# Altium PCB CDH_PCB_reva01.PcbDoc (part 2 of 2)
Units mil, origin at the board's own origin, x right, y up, seen from the top; angles counter-clockwise.
Board outline 4760 x 6365 mil, 4 copper layers (Component Side, Ground Plane, Power Plane, Solder Side), stack 60.8 mil thick; 111 components, 99 nets, 581 pads, 205 vias.
Unrouted connection lines stored in the file: 7.
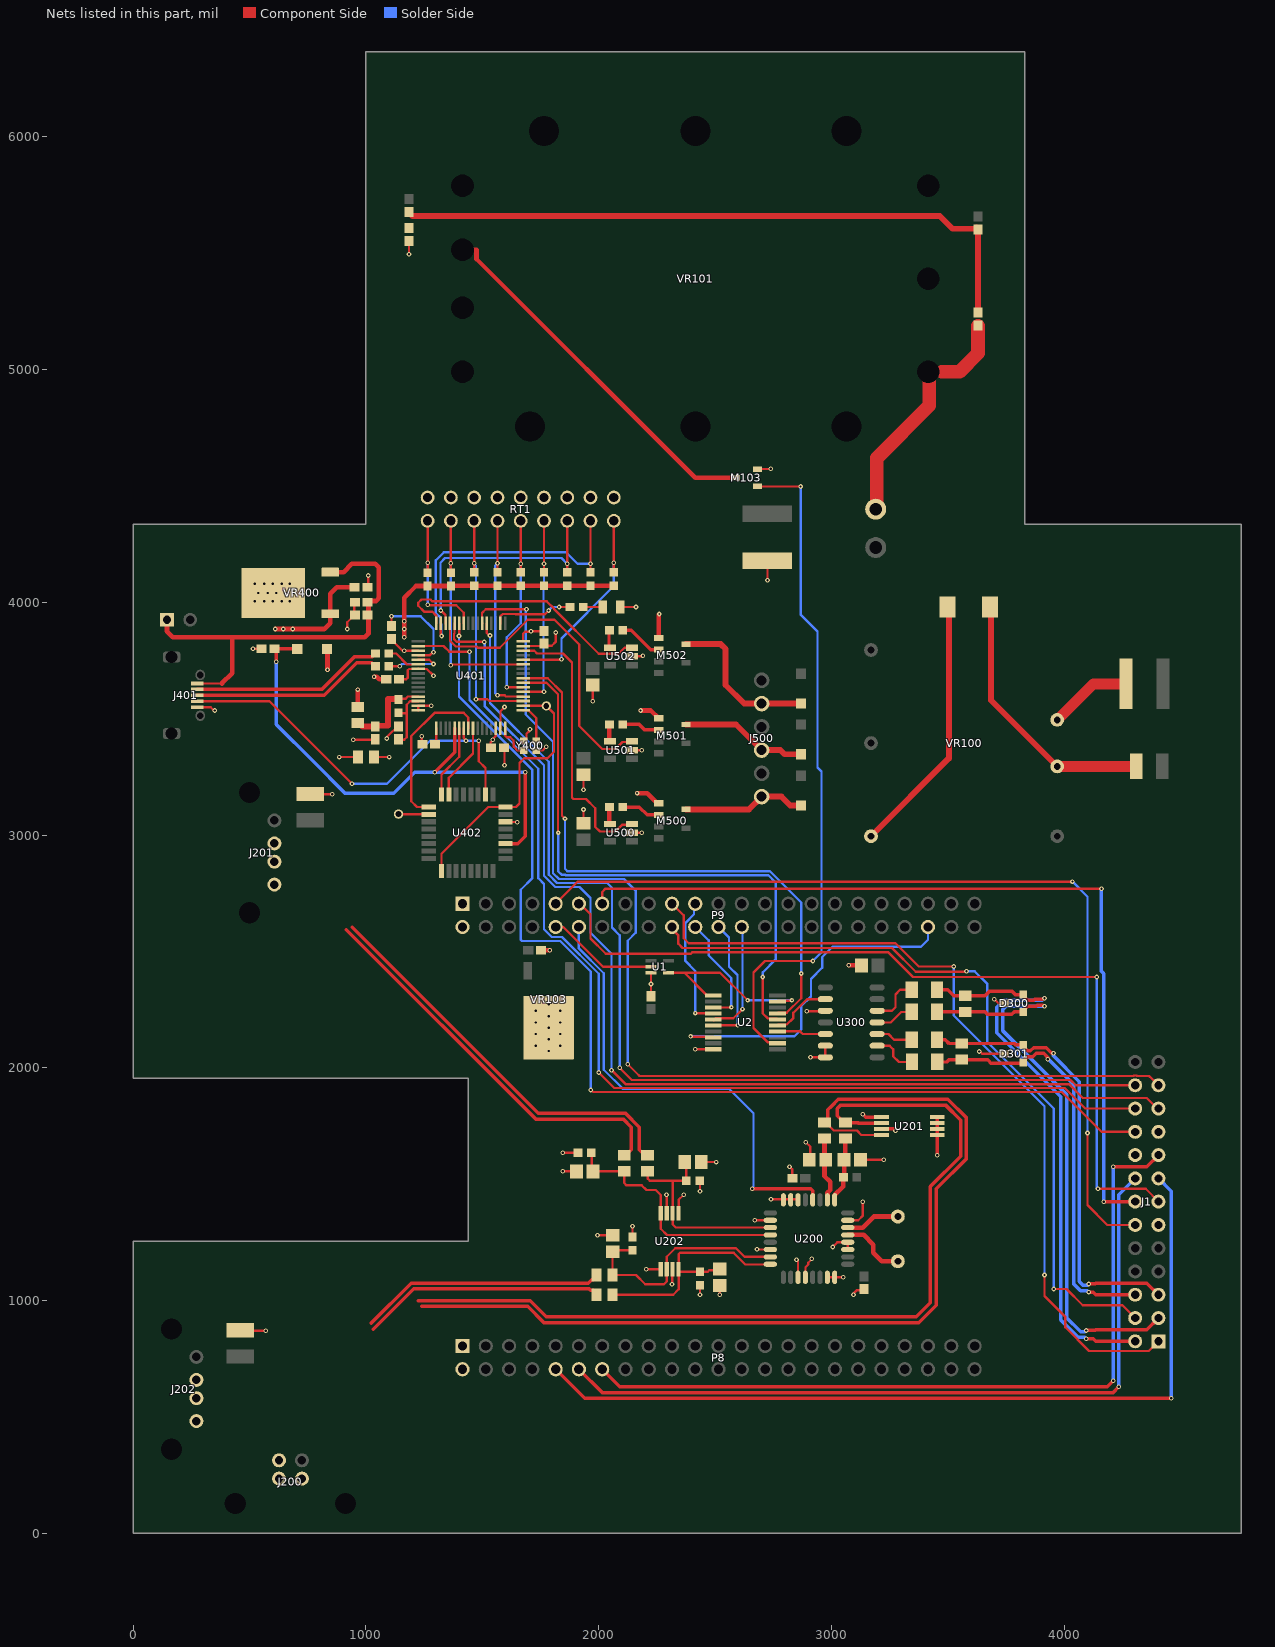
[diagram p4: the nets of this part, all layers, seen from the top]

## Via types
v1: diameter 20, hole 10, Component Side to Solder Side, 183 vias
v2: diameter 20, hole 8, Component Side to Solder Side, 22 vias

## Nets (pads, with @x,y where several pads share a name; then routed paths per layer and width w, separated by ;. In a path a pad name is that pad's centre, name@x,y a point inside that pad or via, vN(x,y) a via of type N, cw(c..) or ccw(c..) an arc to the next point about the centre after c; other vN are vias at no path point) (continued)
GND: C100.1 C101.1 C101.2 C103.1 C109.1 C110.1 C115.1 C200.1 C201.2 C202.2 C203.2 C204.2 C205.2 C206.2 C207.2 C208.1 C209.1 C300.2 C400.2 C401.2 C402.2 C403.2 C404.2 C405.2 C406.2 C410.2 C500.1 C501.1 C502.1 D300.3 D301.3 J1.11 J1.18 J1.19 J200.GND J200.Shield J201.GND J201.Shield J202.GND J202.Shield J401.5 L401.2 LED400.1 M103.2 M500.S1 M501.S1 M502.S1 P8.1 P8.2 P9.1 P9.2 R206.2 R207.2 R208.1 R209.1 U1.3 U2.10 U200.6 U200.7 U200.8 U200.10 U200.14 U200.19 U200.20 U200.23 U200.24 U200.27 U200.28 U200.31 U201.1 U201.3 U201.5 U201.6 U201.7 U201.8 U202.1 U202.3 U202.5 U202.7 U300.3 U300.6 U300.7 U401.4 U401.31 U401.47 U402.6 U500.2 U501.2 U502.2 VR100.2 VR100.5 VR101.4 VR103.4 VR400.4 Y400.2 Y400.4 | length 7440.8
  Component Side w10: J401.5@275,3549.09 333.2,3549.09 347.29,3535 v1(350,3535) ; C203.2@460,872.2 462.2,870 v1(570,870) ; v1(515,3800) C410.2@548.58,3800 ; C202.2@760,3176.1 761.1,3175 v1(855,3175) ; v1(885,3335) L401.2@965.55,3335 ; v1(920,3885) 920,3914.29 950,3944.29 949.29,3945 C406.2@949.29,4000 ; C401.2@1010,4065 v1(1010,4115) ; C404.2@1110,3900.71 v1(1110,3940) ; v1(1185,5495) C115.1@1185,5552.44 ; U401.4@1225,3773 1275.29,3773 1287.29,3785 v1(1290,3785) ; U401.31@1578,3459 1578,3531.65 1595,3548.65 v1(1595,3550) ; v1(1595,3300) 1595,3374.29 C402.2@1595.71,3375 ; U402.6@1599.57,3057.24 1600.69,3056.12 1648.88,3056.12 v1(1650,3055) ; U401.47@1675,3812 1763.71,3812 1765,3813.29 1798.29,3813.29 1815,3830 v1(1815,3870) ; Y400.4@1678.42,3404.67 1680.39,3404.67 1690.16,3414.43 1690.16,3435.16 1700,3445 1700,3447.29 1705,3452.29 v1(1705,3455) ; Y400.2@1731.57,3363.33 1758.33,3363.33 v1(1775,3380) ; v1(1845,1555) C206.2@1904.57,1555 C206.2@1909.49,1555 ; v1(1845,1635) R207.2@1911.46,1635 ; C500.1@1920,3050 1935,3065 v1(1935,3110) ; v1(1935,3194.57) C501.1@1935,3259.13 ; v1(1975,3575) C502.1@1975,3644.57 ; v1(1995,1280) 2054.49,1280 2059.49,1275 C208.1@2060,1275.51 ; LED400.1@2092.4,3980 v2(2160,3980) ; U500.2@2142.24,3010 v1(2185,3010) ; U501.2@2142.24,3365 v1(2185,3365) ; U502.2@2142.24,3767.4 2143.54,3768.7 2188.7,3768.7 v1(2190,3770) ; R208.1@2145,1273.54 v1(2145,1320) ; v1(2205,1135) 2266.54,1135 U202.1@2266.61,1134.92 ; C109.1@2225,2307.56 v1(2225,2360) 2225,2408.62 U1.3@2225.2,2408.82 ; M500.S1@2250.98,3136.69 M500.S1@2257.68,3136.69 ; v2@2257.68,3947.68 v2(2260,3950) ; v1(2291.55,1455.11) 2292.2,1454.46 U202.7@2292.2,1375.08 ; v1(2315,1070) 2316.4,1071.4 2316.4,1133.52 U202.3@2317.8,1134.92 ; U202.5@2343.39,1375.08 2343.39,1433.39 v1(2365,1455) ; v1(2415,2080) 2492.05,2080 U2.10@2492.2,2079.84 ; R206.2@2433.54,1515 2435,1513.54 v1(2435,1470) ; v1(2435,1025) R209.1@2435,1066.46 R209.1@2436.46,1065 ; C207.2@2435.51,1595 C207.2@2440.43,1595 v1(2505,1595) ; v1(2520,1025) C209.1@2520,1064.57 2520,1069.49 C209.1@2520.51,1070 ; v1(2670,1345) 2670.08,1345.08 U200.10@2737.4,1345.08 ; v1(2680,1220) 2680.45,1219.55 2736.95,1219.55 U200.14@2737.4,1219.09 ; M103.2@2682.24,4572.4 2737.4,4572.4 v1(2738.7,4573.7) ; v1(2725,4095) C100.1@2725,4179.21 ; v1(2740,1435) 2825,1435 2854.17,1435 U200.6@2856.5,1432.68 ; v1(2820,1575) 2831.46,1563.54 C201.2@2831.46,1525 ; v1(2850,1175) 2856.5,1168.5 U200.19@2856.5,1100 ; U200.20@2887.99,1100 2888.54,1100.55 2888.54,1143.54 2900,1155 2900,1162.29 2915,1177.29 v1(2915,1180) ; v1(2890,1680) 2909.49,1660.51 C204.2@2909.49,1605 ; v1(2893.32,2243.32) 2972.1,2243.32 U300.3@2973.78,2245 ; v1(2910,2045) U300.7@2973.78,2045 U300.6@2973.78,2095 ; U200.23@2982.48,1100 U200.24@3013.98,1100 v1(3050,1100) ; v1(3005,1230) 3025.59,1250.59 U200.28@3070.08,1250.59 U200.27@3070.08,1219.09 ; U200.31@3070.08,1345.08 3115.08,1345.08 3135,1365 v1(3135,1425) ; v1(3095,1025) 3095,1030 3110,1045 3137.09,1045 C200.1@3140,1047.91 ; C205.2@3120.51,1605 C205.2@3125.43,1605 v1(3225,1605) ; v1(3635,2070) 3637.71,2070 3647.71,2060 D301.3@3745.63,2060 ; v1(3700,2295) 3717.6,2277.4 D300.3@3745.63,2277.4
  Component Side w15: v1(3135,1800) 3136.35,1800 3147.97,1788.39 U201.1@3214.92,1788.39 ; U201.3@3214.92,1737.2 3267.8,1737.2 v1(3275,1730) ; v1(3455,1625) 3455,1788.31 U201.8@3455.08,1788.39
  Component Side w20: v1(1035,3680) 1046.32,3680 1057.32,3669 C405.2@1084.29,3669 ; C110.1@1755.71,2505 v1(1790,2505) ; v2(2165,3180) 2207.68,3180 M500.S1@2250.98,3136.69 ; v2(2180,3535) 2224.06,3535 M501.S1@2257.68,3501.38 ; M502.S1@2257.68,3846.69 v2@2257.68,3947.68 ; v1(3075,2440) C300.2@3129.06,2440 C300.2@3133.98,2440
  Component Side w25: VR100.5@3170,2995 3504.45,3329.45 C101.2@3504.45,3975 ; C101.1@3685.55,3975 3685.55,3579.45 VR100.2@3970,3295
  Component Side w47.24: VR100.2@3970,3295 C103.1@4308.9,3295
  Solder Side w10: v1(1110,3940) 1235,3940 1290,3885 v1(1290,3785)
  other v1: 1785,2072.17 1730,2095 1835,2095 1785,2122.17 1730,2145 1835,2145 1785,2172.17 1730,2195 1835,2195 1785,2222.17 1730,2245 1835,2245 1785,2272.17 522.83,4005 562.83,4005 600,4005 637.83,4005 672.83,4005 537.83,4040 577.83,4040 615,4040 652.83,4040 687.83,4040 522.83,4080 562.83,4080 600,4080 637.83,4080 672.83,4080
GND_48V: C111.1 J100.2 VR101.5 | length 1008.3
  Component Side w59: J100.2@3190,4400 3195,4405 3195,4620 3420,4845 3420,4930.21 VR101.5@3420,4990 ; VR101.5@3402.5,4977.5 3414.52,4989.52 VR101.5@3414.52,4989.97 ; VR101.5@3414.54,4990 VR101.5@3415,4990 ; 3475,4990 3550,4990 3630,5070 C111.1@3630,5186.96
GND_BASEPLATE: C111.2 C112.2 C114.1 C115.2 | length 2846.2
  Component Side w25: C112.2@1185,5677.44 1185,5674.49 1199.49,5660 3465,5660 3520,5605 3623.8,5605 3623.8,5611.59 3630,5605.39 C114.1@3630,5602.44 C111.2@3630,5245.12
NetC204_1: C204.1 R201.2 U200.2 | length 278.6
  Component Side w20: R201.2@2970,1695.55 2970.26,1695.3 2970.26,1604.74 2970,1604.49 2970,1535 2995,1510 2995,1475 2982.8,1462.8 2982.8,1432.99 U200.2@2982.48,1432.68
NetC205_1: C205.1 R200.2 R210.1 U200.1 | length 281.9
  Component Side w20: U200.1@3013.98,1432.68 3014.29,1432.99 3014.29,1454.29 3050,1490 3050,1522.28 3051.46,1523.74 R210.1@3051.46,1530 3055.47,1534.02 3055.47,1600.98 3059.74,1605.26 3059.74,1695.3 R200.2@3060,1695.55
NetC206_1: C206.1 R203.1 R207.1 U200.12 U202.8 | length 1075.8
  Component Side w10: R207.1@1968.54,1635 1970.51,1633.03 1970.51,1555 1971.06,1555.55 R203.1@2110,1555.55 2110,1505 2120,1495 2185,1495 2205,1475 2245,1475 2266.61,1453.39 U202.8@2266.61,1375.08 2266.61,1308.39 2292.91,1282.09 U200.12@2737.4,1282.09
NetC207_1: C207.1 R202.1 R206.1 U200.11 U202.6 | length 895.9
  Component Side w10: R202.1@2210,1555.55 2210.24,1555.31 2210.24,1524.76 2220,1515 2320,1515 ; C207.1@2374.49,1595 2376.46,1593.03 R206.1@2376.46,1515 2320,1515 ; U200.11@2737.4,1313.58 2331.42,1313.58 2317.8,1327.2 U202.6@2317.8,1375.08 2317.8,1512.8 2320,1515
NetC208_2: C208.2 R204.1 R208.2 U200.15 U202.2 | length 1026.8
  Component Side w10: R208.2@2145,1216.46 2061.97,1216.46 2059.45,1213.94 R204.1@2059.45,1110 2160,1110 2200,1070 2280,1070 2292.2,1082.2 U202.2@2292.2,1134.92 2292.2,1188.17 2329.03,1225 2590,1225 2627.4,1187.6 U200.15@2737.4,1187.6
NetC209_2: C209.2 R205.1 R209.2 U200.16 U202.4 | length 1052.9
  Component Side w10: R205.1@2059.45,1025 2320,1025 2343.39,1048.39 U202.4@2343.39,1127.4 ; C209.2@2513.03,1123.54 2520,1130.51 2475.51,1130.51 2468.54,1123.54 R209.2@2435,1123.54 2347.24,1123.54 U202.4@2343.39,1127.4 ; U200.16@2737.4,1156.1 2736.3,1155 2630,1155 2580,1205 2349.24,1205 2343.39,1199.14 U202.4@2343.39,1134.92 U202.4@2343.39,1127.4
NetC400_1: C400.1 C406.1 J401.1 P400.1 VR400.3 | length 1805
  Component Side w10: J401.1@275,3651.46 381.46,3651.46
  Component Side w20: P400.1@145,3925 145,3875 170,3850 425,3850 ; 381.46,3651.46 425,3695 425,3850 ; VR400.3@846.26,4129.76 904.76,4129.76 940,4165 1040,4165 1055,4150 1055,4017 1043.28,4005.28 1015.99,4005.28 C406.1@1010.71,4000 ; C406.1@1010.71,4001.18 C406.1@1010.71,4000 ; 425,3850 995,3850 1010.71,3865.71 C406.1@1010.71,4000
NetC407_1: C407.1 L400.1 R400.2 U401.13 | length 385.9
  Component Side w10: R400.2@1140,3584.71 1140.29,3585 1170,3585 1180,3595 U401.13@1225,3595
  Component Side w25: L400.1@965,3480.55 970.91,3480.55 984.9,3466.56 C407.1@1040,3466.56 ; C407.1@1039.71,3470 1040,3469.71 1095,3469.71 1095,3585 1095.29,3584.71 R400.2@1140,3584.71
NetC407_2: C407.2 C408.2 C409.1 L401.1 RT1.2 RT1.4 RT1.6 RT1.8 RT1.10 RT1.12 RT1.14 RT1.16 RT1.18 U401.15 U401.16 | length 350.1
  Component Side w10: v1(945,3410) 1038.29,3410 C407.2@1040,3408.29 ; L401.1@1034.45,3330 1039.45,3335 v1(1100,3335) ; v1(1090,3415) 1091.91,3416.91 1091.91,3422.8 1138.82,3469.71 C408.2@1140,3469.71 ; U401.16@1225,3536 U401.15@1225,3556 1225.5,3555.5 1279.5,3555.5 v1(1280,3555) ; C409.1@1239.29,3390 1240,3390.71 v1(1240,3425)
NetC408_1: C408.1 R400.1 U401.14 | length 272.9
  Component Side w10: C408.1@1140,3408.29 1141.71,3410 1165,3410 1175,3420 1175,3525 ; R400.1@1140,3523.29 1173.29,3523.29 1175,3525 ; 1175,3525 1175,3560 1190.5,3575.5 U401.14@1224.5,3575.5 ; U401.14@1224.5,3575.5 U401.14@1225,3576 U401.14@1224.5,3575.5
NetC409_2: C409.2 U401.17 | length 71.4
  Component Side w10: C409.2@1300.71,3391.18 1300.71,3390 1302,3391.29 U401.17@1302,3459 U401.17@1301.5,3458.5
NetC410_1: C410.1 D400.C U401.21 U402.3 | length 2250
  Component Side w15: v1(615,3745) 614.04,3745.96 614.04,3795.96 610,3800 D400.C@705,3800 ; v1(1295,3270) 1381,3356 U401.21@1381,3459 ; U402.3@1599.57,2962.76 1652.76,2962.76 1685,2995 v1(1685,3270)
  Solder Side w15: v1(615,3745) 615,3475 775,3315 910,3180 1120,3180 1210,3270 v1(1295,3270) v1(1685,3270)
NetD500_2: D500.A J500.1 M500.D1 | length 533.3
  Component Side w25: M500.D1@2375,3110.32 2645.31,3110.32 J500.1@2700,3165 2785,3165 2822.76,3127.24 D500.A@2870,3127.24
NetD502_2: D502.A J500.3 M501.D1 | length 548
  Component Side w25: M501.D1@2375,3475 2590,3475 J500.3@2700,3365 2780,3365 2797.99,3347.01 D502.A@2870,3347.01
NetD504_2: D504.A J500.5 M502.D1 | length 691.6
  Component Side w25: M502.D1@2375,3820.32 2524.69,3820.32 2545,3800 2545,3645 2625,3565 J500.5@2700,3565 D504.A@2870,3565
NetJ1_1: J1.1 P9.19 | length 3588
  Component Side w10: P9.19@2315,2705 2365,2655 2365,2556.58 2386.57,2535 3275,2535 3375,2435 v1(3525,2435) ; v1(3915,1110) 3915,1020 4005,930 4005,885 4107,783 4363,783 J1.1@4405,825
  Solder Side w10: v1(3525,2435) 3525,2225 3915,1835 v1(3915,1110)
NetJ1_4: J1.4 P9.20 | length 3314.3
  Component Side w10: P9.20@2315,2605 2315,2595.4 2342.38,2568.02 2342.38,2532.62 2360,2515 2395,2515 3260,2515 3362,2413 3578,2413 v1(3580,2415) ; v1(3955,1050) 4010,1050 4080,980 4250,980 J1.4@4305,925
  Solder Side w10: v1(3580,2415) 3615,2415 3670,2360 3670,2110 3955,1825 v1(3955,1050)
NetJ1_12: J1.12 P9.9 | length 3916.5
  Component Side w10: P9.9@1815,2705 1910,2800 v2(4035,2800) ; v2(4100,1720) 4100,1410 4185,1325 J1.12@4305,1325
  Solder Side w10: v2(4035,2800) 4100,2735 v2(4100,1720)
NetJ1_13: J1.13 P9.11 | length 3612.9
  Component Side w10: P9.11@1919.36,2705 1965,2659.36 1965,2555 2030,2490 2396.06,2490 2403.06,2497 3243,2497 3350,2390 v1(4140,2390) ; v1(4145,1480) 4350,1480 J1.13@4405,1425
  Solder Side w10: v1(4140,2390) 4140,1485 v1(4145,1480)
NetJ1_14: J1.14 P9.13 | length 3685.5
  Component Side w10: P9.13@2015,2705 2015,2755.22 2029.78,2770 v1(4160,2770)
  Component Side w15: v1(4170,1425) J1.14@4305,1425
  Solder Side w15: v1(4160,2770) 4160,2414.65 4169.5,2405.15 4169.5,1425.5 v1(4170,1425)
NetJ1_15: J1.15 P8.10 | length 3664.6
  Component Side w15: P8.10@1815,705 1940,580 v1(4460,580)
  Solder Side w15: J1.15@4405,1525 4460,1470 v1(4460,580)
NetJ1_16: J1.16 P8.12 | length 3295.8
  Component Side w15: P8.12@1915,705 2015,605 4210,605 v1(4235,630)
  Solder Side w15: v1(4235,630) 4235,1455 J1.16@4305,1525
NetJ1_17: J1.17 P8.14 | length 3372.1
  Component Side w15: P8.14@2015,705 2090,630 4185,630 v1(4210,655) ; v1(4210,1575) 4355,1575 J1.17@4405,1625
  Solder Side w15: v1(4210,655) v1(4210,1575)
NetJ1_20: J1.20 U401.59 | length 4790
  Component Side w10: v1(1400,3855) 1401,3856 U401.59@1401,3909 ; v1(1965.96,1905) 1967.82,1905 1976.82,1896 3989,1896 4160,1725 J1.20@4305,1725
  Solder Side w10: v1(1400,3855) 1400,3595 1715,3280 1715,2815 1665,2765 1665,2550.86 1670.86,2545 1835,2545 1965.96,2414.04 v1(1965.96,1905)
NetJ1_21: J1.21 U401.60 | length 4749.7
  Component Side w10: U401.60@1381,3909 1380.5,3908.5 1380.5,3866.61 1378,3864.11 1378,3842 1390,3830 1508.04,3830 v1(1508.7,3829.35) ; v1(2055,1990) 2115,1930 4020,1930 4080,1870 4355,1870 4400,1825 J1.21@4405,1825
  Solder Side w10: v1(1508.7,3829.35) 1510,3828.04 1510,3555 1765,3300 1765,2825 1813,2777 1918,2777 1965,2730 1965,2580 2055,2490 v1(2055,1990)
NetJ1_22: J1.22 U401.2 | length 4662.9
  Component Side w10: U401.2@1225,3812 1333.65,3812 1357.65,3788 v1(1445,3788) ; v1(2000,1980) 2067,1913 4002,1913 4090,1825 J1.22@4305,1825
  Solder Side w10: v1(1445,3788) 1445,3580 1740,3285 1740,2815 1765,2790 1765,2594.88 1797.88,2562 1842.04,2562 2000,2404.04 v1(2000,1980)
NetJ1_23: J1.23 U401.54 | length 4890.7
  Component Side w10: U401.54@1499.5,3909.5 U401.54@1499,3909 1499,3954 1515,3970 v1(1690,3970) ; v1(2125,2015) 2172.07,1967.93 2175,1965 4292.19,1965 cw(c4305,1925) 4317.81,1965 4365,1965 4367.93,1962.07 J1.23@4405,1925
  Solder Side w10: v1(1690,3970) 1687,3967 1687,3518 1804,3401 1804,2836 1829,2811 2109,2811 2158.74,2761.26 2158.74,2579.96 2125,2546.23 v1(2125,2015)
NetJ1_24: J1.24 U401.53 | length 4520.2
  Component Side w10: U401.53@1519,3909 1519,3867.72 1527.56,3859.16 1531.09,3859.16 v1(1533,3857.25) ; v1(2090,2000) 2142,1948 4027,1948 4050,1925 J1.24@4305,1925
  Solder Side w10: v1(1533,3857.25) 1533,3567 1785,3315 1785,2830 1821,2794 2036.96,2794 2057.51,2773.45 2057.51,2602.37 2090,2569.88 v1(2090,2000)
NetJ400_1: J400.1 U402.18 | length 131
  Component Side w10: J400.1@1140,3090 1140.63,3089.37 1269.8,3089.37 U402.18@1270.43,3088.74
NetJ401_4: J401.4 U401.23 U402.10 | length 1734
  Component Side w10: J401.4@275,3574.69 585.32,3574.69 v1(940,3220) ; U401.23@1420,3459 1420.5,3458.5 1420.5,3417.21 1430,3407.71 v1(1430,3405) ; v1(1485,3405) 1485,3317.01 1513.74,3288.27 U402.10@1513.74,3174.57
  Solder Side w10: v1(940,3220) 1090,3220 1275,3405 v1(1430,3405) v1(1485,3405)
NetJ402_1: J402.1 U401.34 U402.8 U402.25 | length 1152.7
  Component Side w10: U402.25@1324.76,2845.43 1324.76,2919.76 1525.24,3120.24 U402.8@1599.57,3120.24 1599.61,3120.28 1645.28,3120.28 1660,3135 1660,3310 1680,3330 1780,3330 1808,3358 1808,3522 J402.1@1775,3555 1774.5,3555.5 1675.5,3555.5 U401.34@1675,3556
NetL100_2: L100.2 VR100.1 | length 359.7
  Component Side w47.24: VR100.1@3970,3495 4125,3650 L100.2@4265.47,3650
NetLED400_2: LED400.2 R403.1 | length 84.1
  Component Side w10: R403.1@1933.54,3980 LED400.2@2017.6,3980
NetM103_1: M103.1 U2.12 | length 2920.5
  Component Side w10: M103.1@2682.24,4497.6 v2(2867.4,4497.6) ; U2.12@2767.8,2105.43 2763.94,2109.29 2727.28,2109.29 2665,2171.57 2665,2410 2714.04,2459.04 v2(2920,2459.04)
  Solder Side w10: v2(2867.4,4497.6) 2867.4,3947.6 2940,3875 2940,3289.95 2957.51,3272.44 2957.51,2496.55 v2(2920,2459.04)
NetM103_3: M103.3 VR101.2 | length 1602.1
  Component Side w20: VR101.2@1415,5515 1475,5515 1475,5475 2415,4535 M103.3@2587.76,4535
NetM500_G1: M500.G1 R500.2 | length 167.9
  Component Side w15: R500.2@2103.54,3120 2175,3120 2208.31,3086.69 M500.G1@2257.68,3086.69
NetM501_G1: M501.G1 R501.2 | length 163.9
  Component Side w15: R501.2@2103.54,3475 2175,3475 2198.62,3451.38 M501.G1@2257.68,3451.38
NetM502_G1: M502.G1 R502.2 | length 188.6
  Component Side w15: R502.2@2103.54,3880 2140,3880 2223.31,3796.69 M502.G1@2257.68,3796.69
NetP9_10: P9.10 U1.2 | length 480.9
  Component Side w10: P9.10@1815,2605 1847.81,2605 2018.4,2434.41 U1.2@2225.2,2434.41
NetP9_12: P9.12 U200.4 | length 2017.9
  Component Side w15: v1(2660,1480) 2910.7,1480 2919.49,1471.21 U200.4@2919.49,1432.68
  Solder Side w10: P9.12@1915,2616.29 P9.12@1915,2605 1915,2513.08 2022,2406.08 2022,1991.89 2103.89,1910 2560,1910 2665,1805 2665,1487.71 2660,1482.71 v1(2660,1480)
NetP9_21: P9.21 U2.4 | length 583.1
  Component Side w10: v2(2415,2235) 2415.81,2234.19 2491.4,2234.19 U2.4@2492.2,2233.39
  Solder Side w10: v2(2415,2235) 2415,2416.11 2372.49,2458.62 2372.49,2622.61 2409.37,2659.49 2409.37,2699.37 P9.21@2415,2705
NetP9_22: P9.22 U2.3 | length 487.4
  Component Side w10: U2.3@2492.2,2258.98 2492.72,2259.49 2569.49,2259.49 v2(2570,2260)
  Solder Side w10: P9.22@2415,2605 2472.49,2547.51 2472.49,2482.51 2570,2385 v2(2570,2260)
NetP9_24: P9.24 U2.6 | length 562.7
  Component Side w10: U2.6@2492.2,2182.2 v2(2597.8,2182.2)
  Solder Side w10: P9.24@2515,2605 2560,2560 2560,2434.45 2596,2398.45 2596,2184 v2(2597.8,2182.2)
NetP9_26: P9.26 U2.5 | length 499.4
  Component Side w10: U2.5@2492.2,2207.8 2495,2205 2502.53,2212.53 2578.53,2212.53 v2(2618,2252)
  Solder Side w10: v2(2618,2252) P9.26@2618,2605
NetP9_42: P9.42 U2.8 | length 1474.6
  Component Side w10: v2(2395,2135) 2396.91,2133.09 2490.14,2133.09 U2.8@2492.2,2131.02
  Solder Side w10: v2(2395,2135) 2840,2135 2870,2165 2870,2265 2912,2307 2912,2382 2960,2430 2960,2475 3005,2520 3385,2520 3415,2550 P9.42@3415,2605
NetR1_1: R1.1 RT1.1 U401.58 | length 618.4
  Component Side w10: v1(1265,3990) 1266.91,3988.09 1276.9,3988.09 1277.99,3987 1388,3987 1420,3955 U401.58@1420,3909 ; R1.1@1265,4127.09 v1(1265,4170) RT1.1@1265,4350
  Solder Side w10: v1(1265,3990) v1(1265,4170)
NetR2_1: R2.1 RT1.3 U401.43 | length 972.2
  Component Side w10: v1(1365,3730) 1367.71,3730 1370.71,3733 U401.43@1675,3733 ; R2.1@1365,4127.09 v1(1365,4168) RT1.3@1365,4350
  Solder Side w10: v1(1365,3730) v1(1365,4168)
NetR3_1: R3.1 RT1.5 U401.35 | length 1013.1
  Component Side w10: v1@1462.5,4164.79 1465,4162.29 R3.1@1465,4128.54 ; v1@1465,4167.29 v1(1465,4168) RT1.5@1465,4350 ; v1(1473.06,3583.06) 1522.53,3583.06 1529.59,3576 U401.35@1675,3576
  Solder Side w10: v1(1465,4168) 1465,4165.29 1473.06,4157.24 v1(1473.06,3583.06)
NetR4_1: R4.1 RT1.7 U401.36 | length 909.8
  Component Side w10: v1(1565,3600) 1596,3600 1601,3595 U401.36@1675,3595 ; R4.1@1565,4128.54 v1(1565,4168) RT1.7@1565,4350
  Solder Side w10: v1(1565,3600) 1565,3600.86 1555,3610.86 1555,4157.14 1565,4167.14 v1(1565,4168)
NetR5_2: R5.2 RT1.9 U401.38 | length 846.3
  Component Side w10: v1(1605,3635) U401.38@1675,3635 ; R5.2@1665,4128.54 v1(1665,4165) RT1.9@1665,4350
  Solder Side w10: v1(1605,3635) 1605,3850 1665,3910 v1(1665,4165)
NetR6_1: R6.1 RT1.11 U401.37 | length 863.1
  Component Side w10: U401.37@1675,3615 v1(1765,3615) ; R6.1@1765,4128.54 v1(1765,4165) RT1.11@1765,4350
  Solder Side w10: v1(1765,3615) 1765,3617.71 1763,3619.71 1763,4058.09 1765,4060.09 v1(1765,4165)
NetR7_1: R7.1 RT1.13 U401.62 | length 1055.2
  Component Side w10: v1(1322,3965) 1341.5,3945.5 1341.5,3909.5 U401.62@1342,3909 ; R7.1@1865,4128.54 v1(1865,4165) RT1.13@1865,4350
  Solder Side w10: v1(1322,3965) 1322,4069.35 1320,4071.35 1320,4170 1340,4190 1840,4190 v1(1865,4165)
NetR8_1: R8.1 RT1.15 U401.63 | length 1312.3
  Component Side w10: U401.63@1322,3909 1322,3860.71 1325,3857.71 v1(1325,3855) ; R8.1@1965,4128.54 v1(1965,4165) RT1.15@1965,4350
  Solder Side w10: v1(1325,3855) 1325,3906 1322,3909 1322,3933 1300,3955 1300,4180 1335,4215 1860,4215 1910,4165 v1(1965,4165)
NetR9_1: R9.1 RT1.17 U401.44 | length 895.5
  Component Side w10: U401.44@1675,3753 1675.5,3753.5 1838.5,3753.5 v1(1840,3755) ; R9.1@2065,4128.54 v1(2065,4170) RT1.17@2065,4350
  Solder Side w10: v1(1840,3755) 1840,3845 2065,4070 v1(2065,4170)
NetR300_1: R300.1 U300.12 | length 218.3
  Component Side w10: U300.12@3196.22,2245 3260,2245 3275,2260 3275,2315 3295,2335 R300.1@3345,2335
NetR302_1: R302.1 U300.11 | length 167.4
  Component Side w10: U300.11@3196.22,2195 3255,2195 3300,2240 R302.1@3345,2240
NetR303_1: R303.1 U300.10 | length 159.1
  Component Side w10: U300.10@3196.22,2145 3245,2145 3270,2120 R303.1@3345,2120
NetR304_1: R304.1 U300.9 | length 196.2
  Component Side w10: U300.9@3196.22,2095 3250,2095 3265,2080 3265,2050 3290,2025 R304.1@3345.87,2025
NetR401_1: R401.1 U401.5 | length 265.9
  Component Side w10: R401.1@1100.71,3725 v1(1145,3725) ; U401.5@1225,3753 1272,3753 v1(1290,3735)
  Solder Side w10: v1(1145,3725) 1155,3735 v1(1290,3735)
NetR402_1: R402.1 U401.6 | length 114
  Component Side w10: R402.1@1100.71,3780 1130,3780 1177,3733 1195.25,3733
NetR403_2: R403.2 U401.50 | length 348
  Component Side w10: U401.50@1578,3909 1578.5,3909.5 1578.5,3940.97 1587.53,3950 1642.32,3950 1644.32,3948 1768,3948 v2(1785,3965) ; v2(1830,3980) R403.2@1876.46,3980
  Solder Side w10: v2(1785,3965) 1800,3980 v2(1830,3980)
NetR500_1: R500.1 U500.4 | length 74
  Component Side w20: R500.1@2044.29,3120 2046.02,3118.27 2046.02,3049.13 U500.4@2047.76,3047.4
NetR501_1: R501.1 U501.4 | length 74
  Component Side w20: R501.1@2044.29,3475 2046.02,3473.27 2046.02,3404.13 U501.4@2047.76,3402.4
NetR502_1: R502.1 U502.4 | length 76.6
  Component Side w15: R502.1@2044.29,3880 2044.29,3808.27 U502.4@2047.76,3804.8
NetU1_4: U1.4 U2.1 U2.19 | length 781.6
  Component Side w10: U1.4@2300,2408.82 2368.27,2408.82 ; U2.1@2465.79,2311.3 2368.27,2408.82 ; v2(2640,2290) 2521.18,2408.82 2368.27,2408.82 ; U2.19@2767.8,2284.57 2771.32,2288.09 2828.09,2288.09 v2(2830,2290)
  Solder Side w10: v2(2640,2290) v2(2830,2290)
NetU2_14: U2.14 U300.5 | length 210.8
  Component Side w10: U2.14@2767.8,2156.61 2865.32,2156.61 2876.93,2145 U300.5@2973.78,2145
NetU2_15: U2.15 U300.2 | length 265.7
  Component Side w10: U2.15@2767.8,2182.2 2771.65,2186.06 2808.31,2186.06 2836.35,2214.11 2836.35,2236.35 2895,2295 U300.2@2973.78,2295
NetU2_16: U2.16 U401.39 | length 2544.1
  Component Side w10: U401.39@1675,3654 1776,3654 1825,3605 1825,3011 v2(1826,3010) ; v2(2705,2390) 2705,2233.94 2727.28,2211.65 2763.94,2211.65 U2.16@2767.8,2207.8
  Solder Side w10: v2(1826,3010) 1826,2844 1840,2830 1855.96,2830 1857.96,2828 2728.08,2828 2760,2796.08 2760,2465 2705,2410 v2(2705,2390)
NetU2_17: U2.17 U401.40 | length 2571.2
  Component Side w10: U401.40@1675,3674 1781,3674 1842,3613 1842,3083 v2(1855,3070) ; U2.17@2767.8,2233.39 2771.65,2237.24 2808.36,2237.24 2870,2298.89 v2(2870,2405)
  Solder Side w10: v2(1855,3070) 1855,2855 1865,2845 2735.12,2845 2870,2710.12 v2(2870,2405)
NetU200_29: U200.29 Y200.2 | length 282.3
  Component Side w20: U200.29@3070.08,1282.09 3137.91,1282.09 3180,1240 3180,1205 3216.06,1168.94 Y200.2@3285,1168.94
NetU200_30: U200.30 Y200.1 | length 234.6
  Component Side w20: U200.30@3070.08,1313.58 3133.58,1313.58 3181.06,1361.06 Y200.1@3285,1361.06
NetU401_22: U401.22 U402.16 | length 316
  Component Side w10: U402.16@1324.76,3174.57 1324.76,3259.76 1401,3336 U401.22@1401,3459
NetU401_24: U401.24 U402.17 | length 706.4
  Component Side w10: U402.17@1270.43,3120.24 1219.76,3120.24 1195,3145 1195,3425 1295,3525 1420,3525 1440,3505 U401.24@1440,3459
NetU401_25: U401.25 U402.15 | length 327.4
  Component Side w10: U402.15@1356.26,3174.57 1356.26,3246.26 1460,3350 U401.25@1460,3459
NetU401_32: U401.32 Y400.1 | length 178
  Component Side w10: U401.32@1598.5,3435 1598,3435.5 U401.32@1598,3459 1598.5,3458.5 1598.5,3425.86 1604.36,3420 1620,3420 1635,3405 1635,3380 1651.67,3363.33 Y400.1@1678.42,3363.33
NetU401_33: U401.33 Y400.3 | length 168.5
  Component Side w10: U401.33@1675,3536 1698.5,3536 1731.57,3502.93 Y400.3@1731.57,3404.67
NetU401_46: U401.46 U500.3 | length 1189.3
  Component Side w10: U401.46@1675,3792 1723,3792 1735,3780 1846.11,3780 1885,3741.11 1885,3160.86 1890.86,3155 1945,3155 1985,3115 1985,3035 2005,3015 2071.7,3015 2101.65,3044.96 2139.8,3044.96 U500.3@2142.24,3047.4
NetU401_61: U401.61 U501.3 | length 1365.7
  Component Side w10: U401.61@1361,3909 1361,3834.96 1385.96,3810 1475,3810 1480,3805 1575,3805 1695,3925 1810,3925 1916.47,3818.53 1916.47,3468.53 2015,3370 2071.7,3370 2101.65,3399.96 2139.8,3399.96 U501.3@2142.24,3402.4
NetU401_64: U401.64 U502.3 | length 1173
  Component Side w10: U401.64@1302,3909 1301.5,3909.5 1301.5,3943.5 1285,3960 1250,3960 1225,3985 1225,3998.14 1238.86,4012 1277.03,4012 1285.03,4004 1777.11,4004 1808,3973.11 1808,3970.89 1999.86,3779.02 2085.08,3779.02 2110.86,3804.8 U502.3@2142.24,3804.8
RS422-Rx_N: D300.1 J1.3 R301.2 R302.2 | length 2556.4
  Component Side w15: R302.2@3453.27,2240 3500,2240 3574.45,2240 R301.2@3575,2240.55 3659.45,2240.55 3670,2230 3775,2230 3785,2240 D300.1@3824.37,2240 3833.6,2249.23 3833.6,2256.12 3842.39,2264.9 3880.14,2264.9 3884.23,2269 3908.65,2269 3913.65,2264 v1(3915,2264) ; v1(4095,871.5) 4131.5,871.5 4135,875 4355,875 J1.3@4405,925
  Solder Side w15: v1(3915,2264) 3914.04,2264.96 3905.04,2264.96 3905,2265 3750,2265 3735,2250 3735,2160.36 3887.68,2007.68 4010,1885.36 4010,927 4070.5,866.5 4088.65,866.5 4093.65,871.5 v1(4095,871.5)
RS422-Rx_P: D300.2 J1.2 R300.2 R301.1 | length 2541.8
  Component Side w15: R300.2@3453.27,2335 3500,2335 3525.55,2309.45 R301.1@3575,2309.45 3659.45,2309.45 3680,2330 3775,2330 3790.2,2314.8 D300.2@3824.37,2314.8 3833.6,2305.57 3833.6,2298.69 3842.39,2289.9 3869.78,2289.9 3873.88,2294 3908.65,2294 3913.65,2299 v1(3915,2299) ; v1(4095,836.5) 4095.96,835.54 4124.46,835.54 4135,825 J1.2@4305,825
  Solder Side w15: v1(3915,2299) 3914,2299 3905,2290 3739.64,2290 3710,2260.36 3710,2150 3985,1875 3985,916.64 4060.14,841.5 4088.65,841.5 4093.65,836.5 v1(4095,836.5)
RS422-Tx_N: D301.2 J1.5 R303.2 R305.2 | length 1937.2
  Component Side w15: R303.2@3453.27,2120 3489.69,2120 3505.24,2104.45 R305.2@3560,2104.45 3785.55,2104.45 3790,2100 3821.77,2100 D301.2@3824.37,2097.4 3833.6,2088.17 3833.6,2081.29 3842.39,2072.5 3854.82,2072.5 3869.09,2086.77 3922.12,2086.77 3945.91,2062.98 3952.98,2062.98 v1(3953.94,2062.02) ; v1(4105,1071.5) 4105.96,1072.46 4132.46,1072.46 4135,1075 4355,1075 J1.5@4405,1025
  Solder Side w15: v1(3953.94,2062.02) 3953.94,2051.41 4065,1940.36 4065,1082 4080.5,1066.5 4098.65,1066.5 4103.65,1071.5 v1(4105,1071.5)
RS422-Tx_P: D301.1 J1.6 R304.2 R305.1 | length 1819.4
  Component Side w15: R304.2@3454.13,2025 3495,2025 3505.55,2035.55 R305.1@3560,2035.55 3669.45,2035.55 3674.99,2030.01 3685,2020 3821.77,2020 D301.1@3824.37,2022.6 3833.6,2031.83 3833.6,2038.71 3842.39,2047.5 3865.17,2047.5 3879.44,2061.77 3911.76,2061.77 3928.24,2045.3 3928.24,2038.23 v1(3929.19,2037.27) ; v1(4105,1036.5) 4105.96,1035.54 4124.46,1035.54 4135,1025 J1.6@4305,1025
  Solder Side w15: v1(3929.19,2037.27) 3930.55,2037.27 3934.08,2033.74 3936.26,2033.74 4040,1930 4040,1071.64 4070.14,1041.5 4098.65,1041.5 4103.65,1036.5 v1(4105,1036.5)
TEENSY_USB_N: J401.2 R402.2 | length 829.2
  Component Side w15: J401.2@275,3625.87 275.37,3625.49 294.82,3625.49 294.88,3625.43 810.43,3625.43 950,3765 1025.47,3765 1039.29,3778.82 R402.2@1039.29,3780
TEENSY_USB_P: J401.3 R401.2 | length 829.2
  Component Side w15: J401.3@275,3600 275.37,3600.37 294.82,3600.37 294.88,3600.43 820.79,3600.43 960.36,3740 1025.47,3740 1039.29,3726.18 R401.2@1039.29,3725
TN_3V3: C401.1 C402.1 C403.1 C404.1 C405.1 D400.A L400.2 R1.2 R2.2 R3.2 R4.2 R5.1 R6.2 R7.2 R8.2 R9.2 U401.3 U401.7 U401.30 U401.48 VR400.1 | length 2299.1
  Component Side w10: C404.1@1110,3839.49 1157.49,3792 v1(1164.12,3792) U401.3@1225,3792 ; C405.1@1145.71,3669 1172.68,3669 1180,3676.32 1180,3707.64 1185.86,3713.5 1224.5,3713.5 U401.7@1225,3714 1225.5,3713.5 1261.5,3713.5 v1(1290,3685) ; R2.2@1365,4070 R2.2@1366.46,4071.46 ; C402.1@1534.29,3375 1535,3375.71 1535,3397.29 1545,3407.29 v1(1545,3410) 1545,3412.71 1557.5,3425.21 1557.5,3458.5 U401.30@1558,3459 ; U401.48@1675,3832 1675,3865 1684.09,3874.09 1707.09,3874.09 v1(1709,3876) 1760.56,3876 C403.1@1765,3871.56
  Component Side w20: v1(610,3885) v1(645,3885) v1(685,3885) 821.38,3885 846.26,3909.88 VR400.1@846.26,3950.24 846.26,4036.26 875,4065 C401.1@948.58,4065 ; D400.A@832.76,3800 835,3797.76 v1(835,3710) ; L400.2@965,3549.45 v1(965,3625) ; C404.1@1110,3839.49 C404.1@1110,3842.44 ; v1(1165,3850) v1(1165,3885) v1(1165,3918) 1165,4020 1215,4070 R1.2@1265,4070 R2.2@1365,4070 ; R2.2@1366.46,4071.46 R3.2@1465,4071.46 R4.2@1565,4071.46 R5.1@1665,4071.46 R6.2@1765,4071.46 R7.2@1865,4071.46 R8.2@1965,4071.46 R9.2@2065,4071.46
USB_0_N: J200.D- R201.1 U201.4 | length 4104.6
  Component Side w10: R201.1@2970,1764.45 2970.66,1764.45 2975.91,1764.45 3009.56,1730.8 3109.2,1730.8 3128.39,1711.61 U201.4@3214.92,1711.61
  Component Side w15: 1240,975 1695,975 1765,905 3375.36,905 3450,979.64 3450,1479.64 3580,1609.64 3580,1785.36 3500.36,1865 3029.64,1865 3000,1835.36 2984.82,1820.17 2984.82,1778.6 R201.1@2970.66,1764.45
USB_0_P: J200.D+ R200.1 U201.2 | length 3889.9
  Component Side w15: 1225,1000 1705.36,1000 1775.36,930 3365,930 3425,990 3425,1490 3555,1620 3555,1775 3490,1840 3040,1840 3025,1825 3025,1793.54 3054.09,1764.45 R200.1@3060,1764.45 3114.45,1764.45 3116.1,1762.8 U201.2@3214.92,1762.8
USB_1_N: J201.D- R202.2 | length 1736.7
  Component Side w15: J201.D-@606.69,2964.37 J201.D-@611.11,2964.37 ; 940.87,2604.13 1740,1805 2115.36,1805 2175,1745.36 2175,1647.39 2183.79,1638.6 2195.85,1638.6 R202.2@2210,1624.45
USB_1_P: J201.D+ R203.2 | length 1716.6
  Component Side w15: J201.D+@606.69,2885.63 J201.D+@611.11,2885.63 ; 915.87,2593.77 1729.64,1780 2105,1780 2140,1745 2140,1648.54 2130.06,1638.6 2115.91,1624.45 R203.2@2110,1624.45
USB_2_N: J202.D- R204.2 | length 1058.4
  Component Side w15: 1021.87,901.87 1195,1075 1955.55,1075 1970.49,1089.94 1976.4,1089.94 1990.55,1104.09 R204.2@1990.55,1110
USB_2_P: J202.D+ R205.2 | length 1043.9
  Component Side w15: 1032.23,876.87 1205.36,1050 1960.06,1050 1965,1045.06 1976.4,1045.06 1990.55,1030.91 R205.2@1990.55,1025
pads on no net: J1.10 J1.25 J1.26 J200.Vcc J401.shield M500.D2 M500.G2 M500.S2 M501.D2 M501.G2 M501.S2 M502.D2 M502.G2 M502.S2 P8.3 P8.4 P8.5 P8.6 P8.7 P8.8 P8.9 P8.11 P8.13 P8.15 P8.16 P8.17 P8.18 P8.19 P8.20 P8.21 P8.22 P8.23 P8.24 P8.25 P8.26 P8.27 P8.28 P8.29 P8.30 P8.31 P8.32 P8.33 P8.34 P8.35 P8.36 P8.37 P8.38 P8.39 P8.40 P8.41 P8.42 P8.43 P8.44 P8.45 P8.46 P9.3 P9.4 P9.7 P9.8 P9.14 P9.15 P9.16 P9.17 P9.18 P9.23 P9.25 P9.27 P9.28 P9.29 P9.30 P9.31 P9.32 P9.33 P9.34 P9.35 P9.36 P9.37 P9.38 P9.39 P9.40 P9.41 P9.43 P9.44 P9.45 P9.46 U1.1 U2.2 U2.7 U2.9 U2.11 U2.13 U2.18 U200.5 U200.9 U200.13 U200.17 U200.21 U200.32 U300.1 U300.8 U401.1 U401.8 U401.9 U401.10 U401.11 U401.12 U401.18 U401.19 U401.20 U401.26 U401.27 U401.28 U401.29 U401.41 U401.42 U401.45 U401.49 U401.51 U401.52 U401.55 U401.56 U401.57 U402.1 U402.2 U402.4 U402.5 U402.7 U402.9 U402.11 U402.12 U402.13 U402.14 U402.19 U402.20 U402.21 U402.22 U402.23 U402.24 U402.26 U402.27 U402.28 U402.29 U402.30 U402.31 U402.32 U500.1 U501.1 U502.1 VR100.4 VR100.6 VR101.3 VR101.6 VR101.BASE

## Polygon pours and split planes (outlines as drawn)
no net on Board (solid): 3155,940
GND on Ground Plane (split plane): 3809.9,4335 3810.29,4331.08 3811.43,4327.31 3813.29,4323.83 3815.79,4320.79 3818.84,4318.29 3822.31,4316.43 3826.08,4315.29 3830,4314.9 4739.9,4314.9 4739.9,20.1 20.1,20.1 20.1,1234.9 1440,1234.9 1443.92,1235.29 1447.69,1236.43 1451.17,1238.29 1454.21,1240.79 1456.71,1243.84 1458.57,1247.31 1459.71,1251.08 1460.1,1255 1460.1,1955 1459.71,1958.92 1458.57,1962.69 1456.71,1966.17 1454.21,1969.21 1451.17,1971.71 1447.69,1973.57 1443.92,1974.71 1440,1975.1 20.1,1975.1 20.1,4314.9 1000,4314.9 1003.92,4315.29 1007.69,4316.43 1011.17,4318.29 1014.21,4320.79 1016.71,4323.84 1018.57,4327.31 1019.71,4331.08 1020.1,4335 1020.1,6344.9 3809.9,6344.9
NetC407_2 on Ground Plane (split plane): 2119.9,4497.89 2119.9,4307.11 2092.89,4280.1 1465,4280.1 1463.05,4279.71 1461.4,4278.61 1426.4,4243.61 1425.29,4241.95 1424.9,4240 1424.9,3542.11 1222.89,3340.1 1180,3340.1 1178.05,3339.71 1176.4,3338.61 1156.4,3318.61 1155.29,3316.95 1154.9,3315 1154.9,3262.11 1122.89,3230.1 1067.11,3230.1 990.1,3307.11 990.1,3320 989.71,3321.95 988.6,3323.61 963.6,3348.61 961.95,3349.71 960,3350.1 927.11,3350.1 905.1,3372.11 905.1,3487.89 922.11,3504.9 1195,3504.9 1196.95,3505.29 1198.6,3506.4 1248.6,3556.4 1249.71,3558.05 1250.1,3560 1250.1,4210 1249.71,4211.95 1248.6,4213.61 1195.1,4267.11 1195.1,4502.89 1217.11,4524.9 2092.89,4524.9
3V3 on Power Plane (split plane): 3809.9,4335 3810.29,4331.08 3811.43,4327.31 3813.29,4323.83 3815.79,4320.79 3818.84,4318.29 3822.31,4316.43 3826.08,4315.29 3830,4314.9 4739.9,4314.9 4739.9,20.1 20.1,20.1 20.1,1234.9 1440,1234.9 1443.92,1235.29 1447.69,1236.43 1451.17,1238.29 1454.21,1240.79 1456.71,1243.84 1458.57,1247.31 1459.71,1251.08 1460.1,1255 1460.1,1955 1459.71,1958.92 1458.57,1962.69 1456.71,1966.17 1454.21,1969.21 1451.17,1971.71 1447.69,1973.57 1443.92,1974.71 1440,1975.1 20.1,1975.1 20.1,4314.9 1000,4314.9 1003.92,4315.29 1007.69,4316.43 1011.17,4318.29 1014.21,4320.79 1016.71,4323.84 1018.57,4327.31 1019.71,4331.08 1020.1,4335 1020.1,6344.9 3809.9,6344.9
3V3 on Power Plane (split plane): 2466.4,2361.4 2468.05,2360.29 2470,2359.9 3070,2359.9 3071.95,2360.29 3073.6,2361.4 3137.11,2424.9 3252.89,2424.9 3259.9,2417.89 3259.9,2052.11 3081.4,1873.61 3080.29,1871.95 3079.9,1870 3079.9,1635 3080.29,1633.05 3081.4,1631.4 3164.9,1547.89 3164.9,1142.11 3002.89,980.1 2807.11,980.1 2785.1,1002.11 2785.1,2075 2784.71,2076.95 2783.6,2078.61 2713.6,2148.61 2711.95,2149.71 2710,2150.1 2262.11,2150.1 2160.1,2252.11 2160.1,2367.89 2262.11,2469.9 2357.89,2469.9
TN_3V3 on Power Plane (split plane): 1779.9,3897.89 1779.9,3812.11 1601.4,3633.61 1600.29,3631.95 1599.9,3630 1599.9,3407.11 1557.89,3365.1 1397.11,3365.1 1213.6,3548.61 1211.95,3549.71 1210,3550.1 937.11,3550.1 683.61,3803.6 683.6,3803.61 658.6,3828.61 656.95,3829.71 655,3830.1 562.11,3830.1 530.1,3862.11 530.1,3930 529.96,3930.71 530.56,3931.11 544.35,3944.9 1732.89,3944.9

## Keep-outs
Keep-Out Layer:
  lines w10: 278.07,147.95 ccw(c160,145) 278.08,147.68 ; 278.07,1097.95 ccw(c160,1095) 278.08,1097.68 ; 278.07,2107.95 ccw(c160,2105) 278.08,2107.68 ; 278.07,4180.95 ccw(c160,4178) 278.08,4180.68 ; 1258.07,6215.95 ccw(c1140,6213) 1258.08,6215.68 ; 1333.07,757.95 ccw(c1215,755) 1333.08,757.68 ; 1333.07,2657.95 ccw(c1215,2655) 1333.08,2657.68 ; 2503.07,147.95 ccw(c2385,145) 2503.08,147.68 ; 2503.07,1772.95 ccw(c2385,1770) 2503.08,1772.68 ; 2503.07,4180.95 ccw(c2385,4178) 2503.08,4180.68 ; 3795.07,6215.95 ccw(c3677,6213) 3795.08,6215.68 ; 3933.07,882.95 ccw(c3815,880) 3933.08,882.68 ; 3933.07,2532.95 ccw(c3815,2530) 3933.08,2532.68 ; 4730.07,147.95 ccw(c4612,145) 4730.08,147.68 ; 4730.07,2717.95 ccw(c4612,2715) 4730.08,2717.68 ; 4730.07,4180.95 ccw(c4612,4178) 4730.08,4180.68

## Other copper
Component Side:
  region: 85,3220
Ground Plane (plane layer: these items are gaps in the copper):
  lines w10: 900,3370 925,3345 960,3345 985,3320 985,3305 1065,3225 1125,3225 1160,3260 1160,3315 1180,3335 1225,3335 1430,3540 1430,4240 1465,4275 2095,4275 2125,4305 2125,4500 2095,4530 1215,4530 1190,4505 1190,4265 1245,4210 1245,3560 1195,3510 920,3510 900,3490 900,3370
Power Plane (plane layer: these items are gaps in the copper):
  lines w10: 525,3930 525,3860 560,3825 655,3825 680,3800 935,3545 1210,3545 1395,3360 1560,3360 1605,3405 1605,3630 1785,3810 1785,3900 1735,3950 725,3950 545,3950 542.24,3950 526.95,3934.71 ; 2155,2250 2155,2370 2260,2475 2360,2475 2470,2365 3070,2365 3135,2430 3255,2430 3265,2420 3265,2050 3085,1870 3085,1635 3170,1550 3170,1140 3005,975 2805,975 2780,1000 2780,2075 2710,2145 2260,2145 2155,2250

## Silkscreen, mask and mechanical layers (free items; w line width, h text height)
Top Overlay:
  lines w5: 915,3440 1005,3440 ; 985,3660 1055,3660
  lines w10: 415,2330 415,2245 400,2230 ; 600,2335 600,2250 585,2235 ; 780,2327.5 780,2357.5 ; 825,2357.5 780,2357.5 ; 1025,2155 1035,2165 1035,2210 ; 400,2230 400,2320 410,2330 485,2330 ; 400,2230 335,2230 335,2380 360,2405 485,2405 ; 455,2150 475,2150 500,2175 500,2300 485,2315 ; 455,2150 335,2150 335,2215 410,2215 425,2230 425,2315 485,2315 ; 455,2150 485,2180 485,2315 ; 485,2330 500,2315 500,2390 485,2405 ; 485,2330 485,2405 ; 585,2235 520,2235 520,2385 545,2410 670,2410 ; 585,2235 585,2325 595,2335 670,2335 ; 640,2155 670,2185 670,2320 ; 640,2155 520,2155 520,2220 595,2220 610,2235 610,2320 670,2320 ; 640,2155 660,2155 685,2180 685,2305 670,2320 ; 670,2335 670,2410 ; 670,2335 685,2320 685,2395 670,2410 ; 765,2155 715,2155 715,2395 730,2410 860,2410 ; 765,2155 780,2170 780,2265 ; 765,2155 765,2280 ; 765,2280 780,2265 ; 765,2280 860,2280 ; 765,2372.5 815,2372.5 825,2362.5 825,2327.5 765,2327.5 765,2372.5 ; 765,2372.5 780,2357.5 ; 780,2265 870,2265 ; 860,2280 870,2270 870,2265 ; 860,2280 860,2410 ; 860,2410 875,2395 875,2270 870,2265 ; 940,2195 955,2210 ; 940,2195 940,2410 ; 940,2195 1020,2195 ; 940,2410 955,2395 955,2210 ; 940,2410 895,2410 895,2155 940,2155 1020,2155 1020,2195 ; 955,2210 1035,2210 ; 1020,2195 1035,2210
  text "CHONK" at 2540,4340 h60 r270
  text "Remove when / programming" at 410,3860 h30 r90
  text "Oasis Rev. 1" at 330,2035 h60
Board:
  circle w10: c160,1095 r62.5
  circle w10: c3370,4464 r59.51
  circle w10: c2980,4318 r60.9
  circle w10: c160,2105 r62.5
  circle w10: c3677,6213 r62.5
  circle w10: c1140,6213 r62.5
  circle w10: c1215,755 r62.5
  circle w10: c160,4178 r62.5
  circle w10: c4612,2715 r62.5
  circle w10: c4612,4178 r62.5
  circle w10: c2385,4178 r62.5
  circle w10: c160,145 r62.5
  circle w10: c2385,1770 r62.5
  circle w10: c4612,145 r62.5
  circle w10: c2385,145 r62.5
  circle w10: c1215,2655 r62.5
  circle w10: c3815,2530 r62.5
  circle w10: c3815,880 r62.5
  lines w10: 0,0 4760,0 4760,4335 3830,4335 3830,6365 1000,6365 1000,4335 0,4335 0,1955 1440,1955 1440,1255 0,1255 0,0
Dimensions:
  lines w10: 160,1095 160,145 2385,145 4612,145 4612,2715 4612,4178 160,4178 160,2105 ; 1140,6213 3677,6213 ; 1215,755 1215,2655 ; 2386,145 2386,1769 2386,4177 ; 3815,880 3815,2530 ; 8325,4210 8335,4210

## Dimensions
4612,2715 to 4612,145 on Dimensions
0,0 to 160,145 on Dimensions
1000,6365 to 3830,6365 on Dimensions
0,0 to 160,145 on Dimensions
0,4335 to 1000,4335 on Dimensions
0,1955 to 1440,1955 on Dimensions

## Text inside footprints (layer, text, board x,y; h text height)
J100: Top Overlay "1" at 3215,4085 h60 r90; Top Overlay "2" at 3215,4565 h60 r90